# EAGLE board Panel-2 (EAGLE 9.6.2)
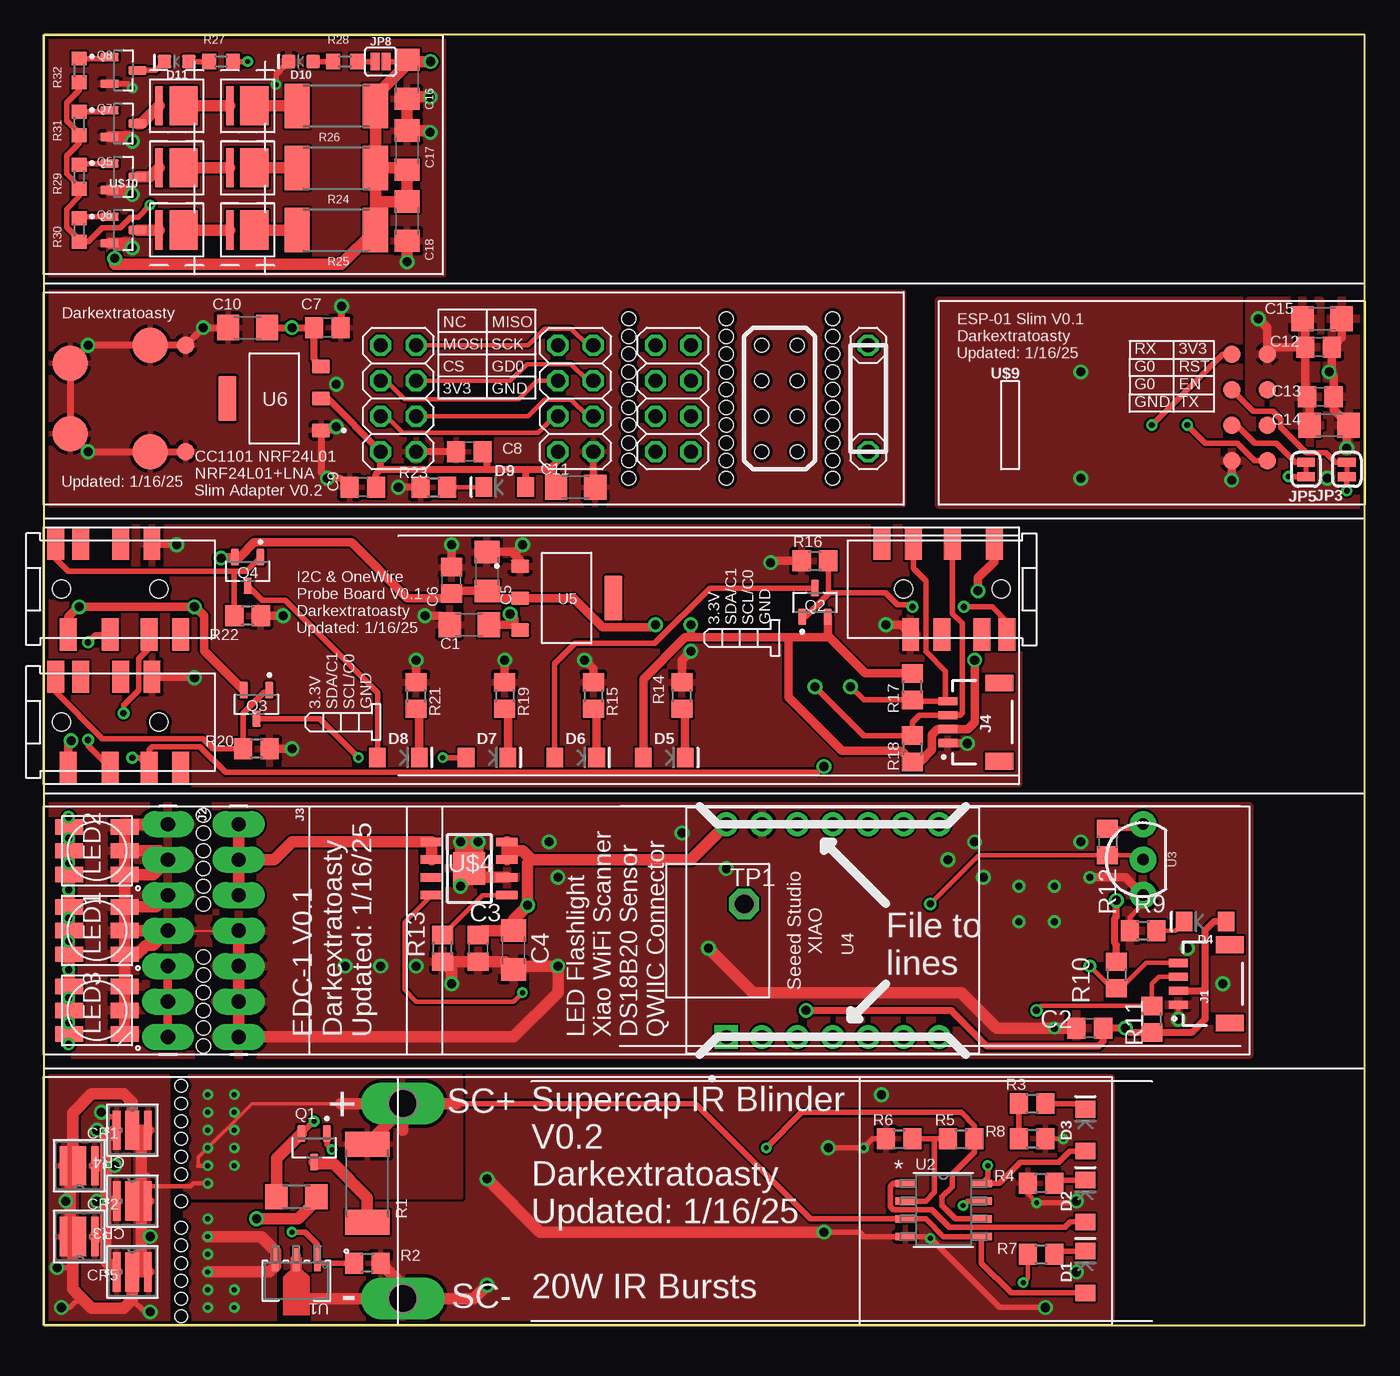
[diagram p0: board, top side]
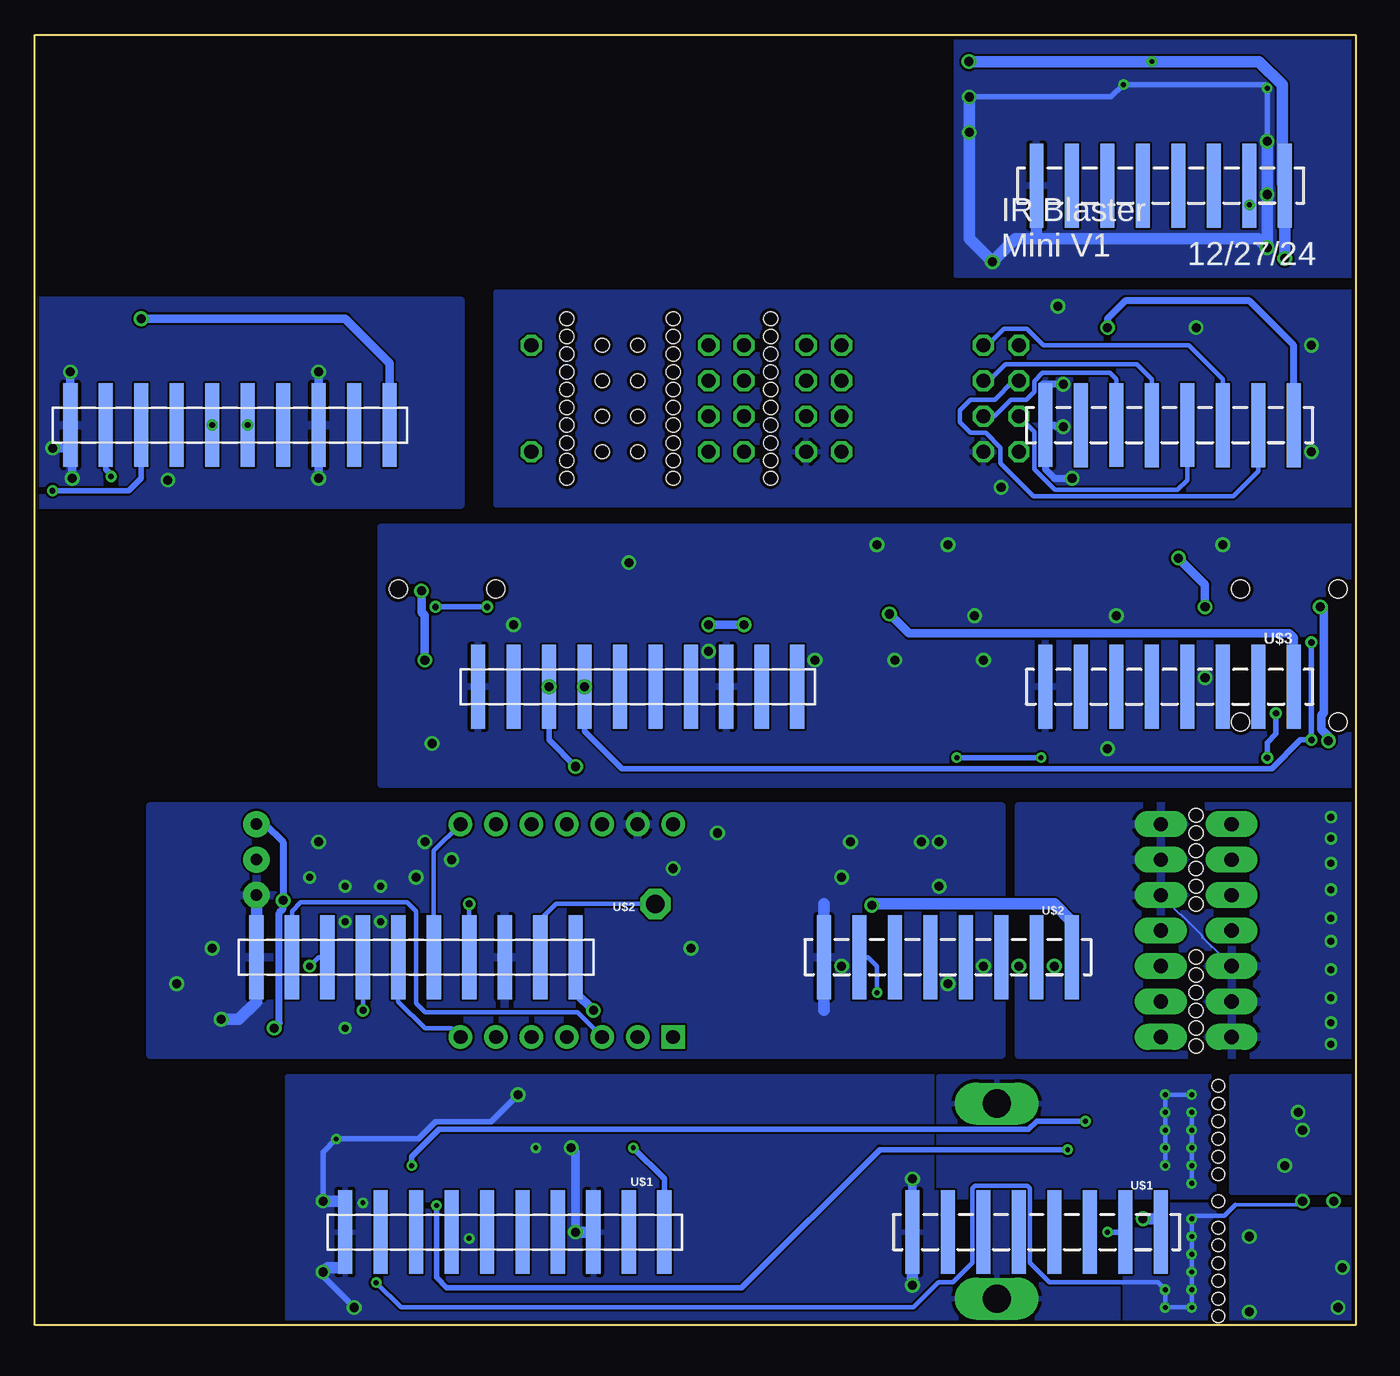
[diagram p1: board, bottom side, seen from below]

Size 94.61 x 92.39 mm. Coordinates in mm from the lower left corner, seen from the top.
Outline: 0,0 94.61,0 94.61,92.39 0,92.39 0,0
Copper layers (1*16): Top 0.035mm / dielectric 1.5mm / Bottom 0.035mm
Design rules "default *": minimum track width 6mil, minimum drill 0.35mm, track to track 6mil, track to pad 6mil, pad to pad 6mil, via to via 6mil, smd to smd 6mil, copper to edge 10mil, drill to drill 6mil, minimum pad ring 10mil, minimum via ring 8mil, stop-mask expansion 4mil, vias tented up to drill 0mil, thermal gap 10mil
Holes 0.9 mm at 9.84,10.79 9.84,8.89 9.84,6.99 9.84,12.06 9.84,13.34 9.84,14.61 9.84,15.88 9.84,17.14 9.84,5.71 9.84,4.45 9.84,3.17 9.84,1.91 9.84,0.64
Holes 1 mm at 11.43,33.97 11.43,32.7 11.43,36.51 11.43,35.24 11.43,21.27 11.43,20 11.43,22.54 11.43,23.81 11.43,25.08 11.43,26.35 11.43,31.43 11.43,30.16 41.91,66.99 41.91,65.72 41.91,64.45 51.44,62.55 53.98,62.55 53.98,65.09 51.44,65.09 51.44,67.63 53.98,67.63 53.98,70.17 51.44,70.17 41.91,68.26 41.91,61.91 41.91,60.64 41.91,63.18 41.91,72.07 41.91,70.8 41.91,69.53 48.9,66.99 48.9,65.72 48.9,64.45 48.9,68.26 48.9,61.91 48.9,60.64 48.9,63.18 48.9,72.07 48.9,70.8 48.9,69.53 56.52,66.99 56.52,65.72 56.52,64.45 56.52,68.26 56.52,61.91 56.52,60.64 56.52,63.18 56.52,72.07 56.52,70.8 56.52,69.53

## Footprints (pad centres in the part's own frame; a part is rotated, then mirrored left to right if it is on the bottom)
C3216 = smd 1.6 x 1.8: 1 -1.4,0; 2 1.4,0
C0805 = smd 1.3 x 1.5: 1 -0.95,0; 2 0.95,0
DIODE_VSMA1094250_VIS = smd 0.55 x 2.8: 1 -1.125,0; 3 1.125,0 | smd 1 x 2.8: 2 0,0
LED-1206 = smd 1.2 x 1.4: A -1.5,0; C 1.5,0
LED-0603 = smd 1 x 1: A -0.877,0; C 0.877,0
R1206 = smd 1.6 x 1.803: 1 -1.422,0; 2 1.422,0
JST04_1MM_RA = smd 0.6 x 1.35: 1 -1.5,0; 2 -0.5,0; 3 0.5,0; 4 1.5,0 | smd 1.2 x 2: NC1 2.8,-3.675; NC2 -2.8,-3.675
1X07_LONGPADS = drill 1.016 pad 1.88 long: 1 0,0; 2 2.54,0; 3 5.08,0; 4 7.62,0; 5 10.16,0; 6 12.7,0; 7 15.24,0
2X04 = drill 1.016 octagon: 1 -3.81,-1.27; 2 -3.81,1.27; 3 -1.27,-1.27; 4 -1.27,1.27; 5 1.27,-1.27; 6 1.27,1.27; 7 3.81,-1.27; 8 3.81,1.27
SMT-JUMPER_2_NC_TRACE_SILK = smd 0.66 x 1.27: 1 -0.521,0; 2 0.521,0
1X01 = drill 1.016 octagon: 1 0,0
SMT-JUMPER_2_NC_PASTE_SILK = smd 0.635 x 1.27: 1 -0.406,0; 2 0.406,0
RGBLED5050 = smd 2 x 1.1: 1 -2,1.7; 2 -2,0; 3 -2,-1.7; 4 2,-1.7; 5 2,0; 6 2,1.7
AO3401 = smd 1.18 x 0.61: 1 -1.025,0.915; 2 -1.025,-0.915; 3 1.025,0
SOT95P240X120-3N = smd 1.32 x 0.6: 1 -1,0.95; 2 -1,-0.95; 3 1,0
R2512 = smd 1.8 x 3.2: 1 -2.8,0; 2 2.8,0
R0805 = smd 1.3 x 1.5: 1 -0.95,0; 2 0.95,0
R0603 = smd 1 x 1.1: 1 -0.85,0; 2 0.85,0
P1-20Y = drill 2.007 pad 2.54 long: TP 0,0
P1-13 = drill 1.321 pad 2.159 octagon: TP 0,0
B1,27 = smd 1.27 x 1.27: TP 0,0
B2,54 = smd 2.54 x 2.54: TP 0,0
SOT89_NXP = smd 0.483 x 1.638: 1 0,-1.505; 2 1.5,-1.505; 3 -1.5,-1.505
SO8_STM = smd 1.46 x 0.533: 1 -2.724,1.905; 2 -2.724,0.635; 3 -2.724,-0.635; 4 -2.724,-1.905; 5 2.724,-1.905; 6 2.724,-0.635; 7 2.724,0.635; 8 2.724,1.905
TO-92-AMMO = drill 0.813 pad 1.88: 1 -2.54,0; 2 0,0; 3 2.54,0
XIAO-GENERIC-THRUHOLE-MODULE14P-2.54-21X17.8MM = drill 1 pad 1.7 square: 1 -7.62,7.62 | drill 1 pad 1.7: 2 -7.62,5.08; 3 -7.62,2.54; 4 -7.62,0; 5 -7.62,-2.54; 6 -7.62,-5.08; 7 -7.62,-7.62; 8 7.62,-7.62; 9 7.62,-5.08; 10 7.62,-2.54; 11 7.62,0; 12 7.62,2.54; 13 7.62,5.08; 14 7.62,7.62
SOT229P700X180-4N = smd 1.31 x 0.93: 1 -3.345,2.29; 2 -3.345,0; 3 -3.345,-2.29 | smd 1.31 x 3.24: 4 3.345,0
BOTH-SMD = smd 1.02 x 6 bottom: 1 7.62,0; 2 10.16,0; 3 12.7,0; 4 15.24,0; 5 17.78,0; 6 20.32,0; 7 22.86,0; 8 25.4,0; 9 27.94,0; 10 30.48,0 | smd 1 x 6 bottom: 19 -27.94,-0.001; 20 -22.86,-0.001; 21 -20.32,0.001; 22 -17.78,-0.001; 23 -15.24,0.001; 24 -12.7,-0.001; 25 -10.16,0.001; 26 -25.4,-0.001
SOIC127P600X175-9N = smd 1.55 x 0.6: 1 -2.7,1.905; 2 -2.7,0.635; 3 -2.7,-0.635; 4 -2.7,-1.905; 5 2.7,-1.905; 6 2.7,-0.635; 7 2.7,0.635; 8 2.7,1.905 | smd 2.3 x 2.3: 9 0,0
PJ-3938PJ = smd 2.3 x 1.2: P$1 -3.25,6.5; P$2 -3.25,3.5; P$3 -3.25,0.7; P$4 -3.25,-1.55; P$5 3.25,0.5; P$6 3.25,2.75; P$7 3.25,5.6; P$8 3.25,7.4 | hole 1.3: 0,0; 0,7
LEFT-H1-SMD = smd 1 x 6 bottom: 1 0,-0.001; 2 2.54,-0.001; 3 5.08,-0.001; 4 7.62,0.001; 5 10.16,-0.001; 6 12.7,0.001; 7 15.24,-0.001; 8 17.78,0.001
RIGHT-H2-SMD = smd 1.02 x 6 bottom: 1 0,0; 2 2.54,0; 3 5.08,0; 4 7.62,0; 5 10.16,0; 6 12.7,0; 7 15.24,0; 8 17.78,0; 9 20.32,0; 10 22.86,0
XSSYSE03-EMC3838A-H90 = smd 2.032 x 2.794: P$1 -0.496,0 | smd 0.508 x 2.794: P$2 1.27,0

## Placement (x,y rotation side)
C1  22uf  [C3216]  30.48,50.16 180 top
C2  1uf  [C0805]  74.93,21.27 180 top
C3  1uf  [C0805]  31.11,26.99 270 top
C4  22uf  [C3216]  33.66,26.86 270 top
C5  22uf  [C3216]  31.75,53.98 90 top
C6  100nf  [C0805]  29.21,53.34 90 top
C7  100nf  [C0805]  20.32,71.44 0 top
C8  100nf  [C0805]  30.48,62.55 180 top
C9  1uf  [C0805]  22.86,60.01 180 top
C10  22uf  [C3216]  14.61,71.44 180 top
C11  22uf  [C3216]  38.1,60.01 0 top
C12  100nf  [C0805]  91.31,70.04 0 top
C13  1uf  [C0805]  91.44,66.48 0 top
C14  22uf  [C3216]  92.08,64.45 0 top
C15  22uf  [C3216]  91.57,72.07 0 top
C16  22uF  [C3216]  26.04,89.22 270 top
C17  22uF  [C3216]  26.04,84.14 90 top
C18  22uF  [C3216]  26.04,79.06 270 top
CR1  VSMA1094250  [DIODE_VSMA1094250_VIS]  6.35,13.97 0 top
CR2  VSMA1094250  [DIODE_VSMA1094250_VIS]  6.35,8.89 0 top
CR3  VSMA1094250  [DIODE_VSMA1094250_VIS]  2.54,6.35 180 top
CR4  VSMA1094250  [DIODE_VSMA1094250_VIS]  2.54,11.43 180 top
CR5  VSMA1094250  [DIODE_VSMA1094250_VIS]  6.35,3.81 0 top
D1  Blue  [LED-1206]  74.61,3.81 90 top
D2  Green  [LED-1206]  74.61,8.89 90 top
D3  Amber  [LED-1206]  74.61,13.97 90 top
D4  Yellow  [LED-1206]  83.19,28.89 180 top
D5  Red  [LED-1206]  44.45,40.64 0 top
D6  Blue  [LED-1206]  38.1,40.64 0 top
D7  Blue  [LED-1206]  31.75,40.64 0 top
D8  Blue  [LED-1206]  25.4,40.64 0 top
D9  Red  [LED-1206]  33.02,60.01 180 top
D10  Orange  [LED-0603]  18.41,90.49 180 top
D11  Blue  [LED-0603]  9.53,90.49 180 top
F1  FUSE  [R1206]  18.1,9.21 180 top
J1  QWIIC_RIGHT_ANGLE  [JST04_1MM_RA]  81.28,24.45 90 top
J2  [1X07_LONGPADS]  8.89,35.88 270 top
J3  [1X07_LONGPADS]  13.97,35.88 270 top
J4  QWIIC_RIGHT_ANGLE  [JST04_1MM_RA]  64.77,43.18 90 top
JP1  [2X04]  38.1,66.36 90 top
JP2  [2X04]  25.4,66.36 90 top
JP3  JUMPER-SMT_2_NC_TRACE_SILK  [SMT-JUMPER_2_NC_TRACE_SILK]  93.34,61.28 90 top
JP4  [2X04]  45.09,66.36 90 top
JP5  JUMPER-SMT_2_NC_TRACE_SILK  [SMT-JUMPER_2_NC_TRACE_SILK]  90.42,61.28 90 top
JP6  [1X01]  59.05,70.17 0 top
JP7  [1X01]  59.05,62.55 0 top
JP8  JUMPER-SMT_2_NC_PASTE_SILK  [SMT-JUMPER_2_NC_PASTE_SILK]  24.13,90.49 0 top
LED1  RGBLED5050  [RGBLED5050]  3.81,28.26 0 top
LED2  RGBLED5050  [RGBLED5050]  3.81,33.97 0 top
LED3  RGBLED5050  [RGBLED5050]  3.81,22.54 0 top
Q1  AO3401  [AO3401]  19.37,12.7 270 top
Q2  AO3401  [AO3401]  55.24,51.75 90 top
Q3  AO3401  [AO3401]  15.24,44.45 270 top
Q4  AO3401  [AO3401]  14.61,53.98 270 top
Q5  MMBT2222A  [SOT95P240X120-3N]  5.71,82.23 0 top
Q6  MMBT2222A  [SOT95P240X120-3N]  5.71,78.42 0 top
Q7  MMBT2222A  [SOT95P240X120-3N]  5.71,86.04 0 top
Q8  MMBT2222A  [SOT95P240X120-3N]  5.71,89.85 0 top
R1  5R  [R2512]  23.18,10.16 90 top
R2  2K7  [R0805]  23.18,4.45 180 top
R3  2K7  [R0805]  70.8,15.88 0 top
R4  2K7  [R0805]  71.44,10.16 180 top
R5  2K7  [R0805]  65.72,13.34 0 top
R6  27K  [R0805]  61.28,13.34 0 top
R7  2K7  [R0805]  71.44,5.08 0 top
R8  1K  [R0805]  70.8,13.34 180 top
R9  2K2  [R0805]  78.74,28.26 0 top
R10  10K  [R0805]  76.83,25.08 270 top
R11  10K  [R0805]  79.38,21.91 90 top
R12  10K  [R0805]  76.2,34.61 270 top
R13  10K  [R0805]  28.57,26.99 90 top
R14  2k2  [R0805]  45.72,45.09 90 top
R15  2k2  [R0805]  39.37,45.09 270 top
R16  10k  [R0805]  55.24,54.74 0 top
R17  10k  [R0805]  62.23,45.72 90 top
R18  10k  [R0805]  62.23,41.27 270 top
R19  2k2  [R0805]  33.02,45.09 270 top
R20  10k  [R0805]  15.24,41.27 180 top
R21  2k2  [R0805]  26.67,45.09 270 top
R22  10k  [R0805]  14.61,50.8 180 top
R23  2K2  [R0805]  27.94,60.01 0 top
R24  5R1  [R2512]  20.95,82.87 0 top
R25  5R1  [R2512]  20.95,78.42 0 top
R26  5R1  [R2512]  20.95,87.31 0 top
R27  2K2  [R0603]  12.7,90.49 0 top
R28  2K2  [R0603]  21.59,90.49 0 top
R29  1K  [R0603]  2.54,82.23 90 top
R30  1K  [R0603]  2.54,78.42 90 top
R31  1K  [R0603]  2.54,86.04 90 top
R32  1K  [R0603]  2.54,89.85 90 top
SC+  PTR1PAD1-20Y  [P1-20Y]  25.72,15.88 90 top
SC-  PTR1PAD1-20Y  [P1-20Y]  25.72,1.91 90 top
TP1  PTR1PAD1-13  [P1-13]  50.16,30.16 0 top
TP2  PTR1B1,27  [B1,27]  10.16,70.17 90 top
TP3  PTR1B1,27  [B1,27]  10.16,62.55 90 top
TP4  PTR1B2,54  [B2,54]  7.62,70.17 0 top
TP5  PTR1B2,54  [B2,54]  7.62,62.55 0 top
TP6  PTR1B2,54  [B2,54]  1.91,63.82 0 top
TP7  PTR1B2,54  [B2,54]  1.91,68.9 0 top
TP8  PTR1B1,27  [B1,27]  87.63,61.91 0 top
TP9  PTR1B1,27  [B1,27]  87.63,64.45 0 top
TP10  PTR1B1,27  [B1,27]  87.63,66.99 0 top
TP11  PTR1B1,27  [B1,27]  87.63,69.53 0 top
TP12  PTR1B1,27  [B1,27]  85.09,61.91 0 top
TP13  PTR1B1,27  [B1,27]  85.09,64.45 0 top
TP14  PTR1B1,27  [B1,27]  85.09,66.99 0 top
TP15  PTR1B1,27  [B1,27]  85.09,69.53 0 top
U1  BSS87  [SOT89_NXP]  18.1,3.17 180 top
U2  LM393DT  [SO8_STM]  64.45,8.26 0 top
U3  DS18B20  [TO-92-AMMO]  78.74,33.34 90 top
U4  XIAO-THRUHOLE  [XIAO-GENERIC-THRUHOLE-MODULE14P-2.54-21X17.8MM]  56.52,28.26 90 top
U5  AMS1117-3.3  [SOT229P700X180-4N]  37.47,52.07 0 top
U6  AMS1117-3.3  [SOT229P700X180-4N]  16.51,66.36 180 top
U$1  BOTH-SMD  [BOTH-SMD]  41.91,6.67 0 top
U$2  BOTH-SMD  [BOTH-SMD]  48.26,26.35 0 top
U$3  BOTH-SMD  [BOTH-SMD]  32.38,45.72 0 top
U$4  CN5711  [SOIC127P600X175-9N]  30.48,32.7 180 top
U$5  PJ-3938PJ  [PJ-3938PJ]  61.59,52.7 270 top
U$6  PJ-3938PJ  [PJ-3938PJ]  8.26,43.18 90 top
U$7  PJ-3938PJ  [PJ-3938PJ]  8.26,52.7 90 top
U$8  LEFT-H1-SMD  [LEFT-H1-SMD]  4.45,64.45 0 top
U$9  RIGHT-H2-SMD  [RIGHT-H2-SMD]  69.22,64.45 0 top
U$10  LEFT-H1-SMD  [LEFT-H1-SMD]  5.08,81.6 0 top
U$11  XSSYSE03-EMC3838A-H90  [XSSYSE03-EMC3838A-H90]  9.53,82.87 180 top
U$12  XSSYSE03-EMC3838A-H90  [XSSYSE03-EMC3838A-H90]  14.61,82.87 180 top
U$13  XSSYSE03-EMC3838A-H90  [XSSYSE03-EMC3838A-H90]  14.61,78.42 180 top
U$14  XSSYSE03-EMC3838A-H90  [XSSYSE03-EMC3838A-H90]  9.53,78.42 180 top
U$15  XSSYSE03-EMC3838A-H90  [XSSYSE03-EMC3838A-H90]  9.53,87.31 180 top
U$16  XSSYSE03-EMC3838A-H90  [XSSYSE03-EMC3838A-H90]  14.61,87.31 180 top

## Library data of the parts
C1-C18 = rcl; SPICEPREFIX: C
CR1-CR5 = VSMA1094250; COPYRIGHT: Copyright (C) 2025 Ultra Librarian. All rights reserved.; MANUFACTURER_PART_NUMBER: VSMA1094250; MFR_NAME: Vishay
D1 D6-D8 = SparkFun-LED; PROD_ID: DIO-09911
D2 = SparkFun-LED; PROD_ID: DIO-00862
D3 D5 D9 = SparkFun-LED; PROD_ID: DIO-09912
D4 = SparkFun-LED; PROD_ID: DIO-09909
D10 = SparkFun-LED; PROD_ID: DIO-00821
D11 = SparkFun-LED; PROD_ID: DIO-08575
F1 R1-R32 = rcl; SPICEPREFIX: R
J1 J4 = SparkFun-Connectors; PROD_ID: CONN-13694
J2 J3 = SparkFun-Connectors
JP1 JP2 JP4 JP6 JP7 = pinhead
JP3 JP5 JP8 = SparkFun-Jumpers
LED1-LED3 = adafruit
Q1-Q4 = DMG2305UX-7; MANUFACTURER: Diodes Inc.; MAXIMUM_PACKAGE_HEIGHT: 1.1mm; PARTREV: 09/2018; STANDARD: IPC-7351B
Q5-Q8 = MMBT2222A; MANUFACTURER: Diotec; MAXIMUM_PACKAGE_HEIGHT: 1.20mm; PARTREV: 2024-03-11; SNAPEDA_PACKAGE_ID: 124619; STANDARD: IPC 7351B
SC+ SC- TP1-TP15 = testpad
U1 = AP4438; COPYRIGHT: Copyright (C) 2025 Ultra Librarian. All rights reserved.; DIGIKEY_PART_NUMBER_1: 568-6228-2-ND; DIGIKEY_PART_NUMBER_2: 568-6228-1-ND; DIGIKEY_PART_NUMBER_3: 568-6228-6-ND; DIGIKEY_PART_NUMBER_4: BSS87INTR-ND; MANUFACTURER_PART_NUMBER: BSS87; MFR_NAME: NXP
U2 = LM393DTR; COPYRIGHT: Copyright (C) 2025 Ultra Librarian. All rights reserved.; MANUFACTURER_PART_NUMBER: LM393DT; MFR_NAME: STMicroelectronics
U3 = DS18B20; AVAILABILITY: In Stock; CHECK_PRICES: https://www.snapeda.com/parts/DS18B20/UMW/view-part/?ref=eda; DESCRIPTION: Temperature Sensor Digital, Local -55°C ~ 125°C 9 b, 10 b, 11 b, 12 b TO-92; MF: UMW; MP: DS18B20; PACKAGE: None; PRICE: None; SNAPEDA_LINK: https://www.snapeda.com/parts/DS18B20/UMW/view-part/?ref=snap
U4 = Seeed Studio XIAO Series
U5 U6 = AMS1117-3.3; AVAILABILITY: Not in stock; CHECK_PRICES: https://www.snapeda.com/parts/AMS1117-3.3/Advanced+Monolithic+Systems/view-part/?ref=eda; DESCRIPTION: Sot223/Pkg 1-Amp 3.3-Volt Low Drop Out Voltage Regulatator; MF: Advanced Monolithic Systems; MP: AMS1117-3.3; PACKAGE: SOT-223 Seeed Technology; PRICE: None; SNAPEDA_LINK: https://www.snapeda.com/parts/AMS1117-3.3/Advanced+Monolithic+Systems/view-part/?ref=snap
U$1-U$3 U$8-U$10 = Flipper-Zero-GPIO-Headers
U$4 = CN5711
U$5-U$7 = PJ-3938PJ
U$11-U$16 = XSSY SE03-EMC3838A-H90

## Nets
5VIN: F1.1 U$1.19
+3V1: C2.1 D4.A J1.2 R10.1 R11.1 R12.1 U3.3 U$2.1
+3V2: C5.1 C6.1 D5.A J4.2 Q2.2 Q3.2 Q4.2 R17.2 R18.2 U5.2 U$5.P$1 U$6.P$1 U$7.P$1
+3V3: R5.2 U2.6 U$1.1
+3V4: C8.1 C9.1 C11.1 D9.A JP1.2 JP2.2 U6.2
+3V5: C12.1 C13.1 C14.1 C15.1 TP11.TP U$9.1
+5V: C3.1 C4.1 U4.14 U$2.19 U$4.3 U$4.4
+5V1: C1.1 U5.3 U$3.19
+5V2: C7.1 C10.1 U6.3 U$8.1
+5V3: C16.1 C17.1 C18.1 JP8.2 R24.2 R25.2 R26.2 R27.2 U$10.1
CHA: JP3.2 TP14.TP
CHB: JP5.2 TP13.TP
CS: JP1.4 JP2.4 U$8.4
FLIP_RX: U4.7 U$2.6
FLIP_TX: U4.8 U$2.5
FRX: TP8.TP U$9.6
FTX: TP15.TP U$9.5
GD0: JP1.3 JP2.3 U$8.6
GND: R2.1 R4.2 R6.1 R8.1 SC-.TP U1.1 U2.4 U$1.3 U$1.10 U$1.25
GND1: C2.2 C3.2 C4.2 J1.1 J2.1 J2.2 J2.3 J2.4 J3.4 J3.5 J3.6 J3.7 LED1.4 LED1.5 LED1.6 LED2.4 LED2.5 LED2.6 LED3.4 LED3.5 LED3.6 R9.1 R13.1 U3.1 U4.13 U$2.3 U$2.10 U$2.25 U$4.2 U$4.9
GND2: C1.2 C5.2 C6.2 J4.1 R14.2 R15.1 R16.1 R19.1 R20.1 R21.1 R22.1 U5.1 U$3.3 U$3.10 U$3.25 U$5.P$5 U$6.P$5 U$7.P$5
GND3: C7.2 C8.2 C9.2 C10.2 C11.2 JP1.1 JP2.1 R23.1 TP2.TP TP3.TP TP4.TP TP5.TP TP6.TP TP7.TP U6.1 U$8.8
GND4: C12.2 C13.2 C14.2 C15.2 TP12.TP U$9.3 U$9.10
GND5: C16.2 C17.2 C18.2 D10.C Q5.2 Q6.2 Q7.2 Q8.2 U$10.8
INPUT: R2.2 U1.3 U$1.26
LED+: J2.5 J2.6 J2.7 J3.1 J3.2 J3.3 LED1.1 LED1.2 LED1.3 LED2.1 LED2.2 LED2.3 LED3.1 LED3.2 LED3.3 U$4.5 U$4.6
LED_TRIG: U$2.24 U$4.8
MISO: JP1.7 JP2.7 U$8.3
MOSI: JP1.6 JP2.6 U$8.2
N$1: Q1.3 R1.1
N$2: CR1.2 CR1.3 CR2.2 CR2.3 CR3.2 CR3.3 CR4.2 CR4.3 CR5.2 CR5.3 D1.A R1.2 SC+.TP U2.3 U2.5
N$3: D2.A U2.1
N$4: R5.1 R6.2 U2.2
N$5: Q1.1 U2.7
N$6: D2.C R4.1
N$7: D1.C R7.2
N$8: D3.C R3.2
N$9: R3.1 R8.2
N$10: R13.2 U$4.1
N$11: D3.A F1.2 Q1.2 U2.8
N$12: D4.C R9.2
N$13: CR1.1 CR2.1 CR3.1 CR4.1 CR5.1 R7.1 U1.2
N$14: TP1.TP U$2.2
N$15: D6.C R15.2
N$16: Q2.1 R16.2 U$5.P$8
N$17: D7.C R19.2
N$18: Q3.1 R20.2 U$6.P$8
N$19: D8.C R21.2
N$20: Q4.1 R22.2 U$7.P$8
N$21: D5.C R14.1
N$22: D6.A Q2.3
N$23: D7.A Q3.3
N$24: D8.A Q4.3
N$25: D9.C R23.2
N$26: JP3.1 U$9.8
N$27: JP5.1 U$9.9
N$28: D10.A R28.1
N$29: Q5.1 R29.2
N$30: Q5.3 U$11.P$2
N$31: U$11.P$1 U$12.P$2
N$32: R24.1 U$12.P$1
N$33: R25.1 U$13.P$1
N$34: U$13.P$2 U$14.P$1
N$35: Q6.3 U$14.P$2
N$36: Q6.1 R30.2
N$37: Q7.1 R31.2
N$38: Q7.3 U$15.P$2
N$39: U$15.P$1 U$16.P$2
N$40: R26.1 U$16.P$1
N$41: D11.A R27.1
N$42: D11.C Q8.3
N$43: Q8.1 R32.2
N$44: R29.1 R30.1 R31.1 R32.1 U$10.2
N$45: JP8.1 R28.2
SCK: JP1.5 JP2.5 U$8.5
SCL: J1.4 R10.2 U$2.8
SCL1: J4.4 R17.1 U$3.8 U$5.P$3 U$6.P$3 U$7.P$3
SDA: J1.3 R11.2 U$2.7
SDA1: J4.3 R18.1 U$3.7 U$5.P$2 U$6.P$2 U$7.P$2
THERM: R12.2 U3.2 U$2.4
WIFI_CHECK: U4.3 U$2.9

## Tracks (layer width: path | path; a pad name or v marks a point on that pad's centre or on a via)
5VIN  (via drill 0.65)
  Top 0.813: v15.24,7.62 18.21,7.62 19.52,8.93 F1.1
  Bottom 0.813: U$1.19 13.97,7.62 v15.24,7.62
+3V1  (via drill 0.65)
  Top 0.305: R12.1 78.42,35.56 U3.3
  Top 0.508: v54.61,22.54 54.62,22.53 65.03,22.53 67.57,19.99 75.56,19.99 75.88,20.31 C2.1 v77.47,21.27 77.78,20.96 R11.1 82.23,20.96 83.19,21.91 83.19,23.81 | D4.A 83.82,28.89 83.19,28.26 83.19,24.08 | 83.19,24.08 83.19,23.81 | J1.2 83.05,23.95 | 83.05,23.95 83.19,23.81 | 83.05,23.95 83.19,24.08 | R10.1 76.83,27.24 76.73,27.34 76.73,29.18 76.83,29.28 v76.83,30.42
  Bottom 0.508: v77.47,21.27 77.12,21.63 77.12,29.52 76.83,29.8 v76.83,30.42 76.83,34.61 78.11,35.88 U3.3
  Bottom 0.61: U$2.1 55.88,23.81 v54.61,22.54
+3V2  (via drill 0.65)
  Top 0.61: R17.2 58.86,46.67 56.29,49.24 | D5.A 42.95,46.25 45.95,49.24 46.35,49.24 | 56.29,49.24 53.34,49.24 | 53.34,49.24 46.35,49.24 | 53.34,49.24 53.34,44.96 57.18,41.12 61.44,41.12 R18.2 62.76,40.33 63.64,41.2 63.64,42.3 64.02,42.68 J4.2 66.2,42.68 66.68,43.17 v66.68,47.62 | U$5.P$1 68.09,54.69 66.93,53.52 v66.93,52.58 | v43.81,50.16 43.64,49.99 40.02,49.99 37.95,52.07 U5.2 32.26,52.07 C5.1 29.39,52.58 C6.1 28.89,52.07 26.04,52.07 22.06,56.05 15.07,56.05 14.02,55 Q4.2 12.77,55 v12.7,54.93 | v46.35,50.16 46.35,49.24 | U$7.P$1 1.75,50.73 2.46,51.44 v2.54,51.44 v10.79,51.44 10.86,51.44 11.5,50.79 11.5,48.3 Q3.2 | U$6.P$1 1.75,41.66 v1.96,41.86 | Q2.2 56.16,49.37 56.29,49.24
  Bottom 0.61: v66.93,52.58 v66.92,52.57 66.92,51.07 66.68,50.83 v66.68,47.62 | v43.81,50.16 v46.35,50.16 | v1.96,41.86 1.96,42.17 2.46,42.68 2.46,43.68 2.29,43.85 2.29,51.19 v2.54,51.44 | v10.79,51.44 10.79,53.02 v12.7,54.93
+3V3  (via drill 0.35)
  Top 0.406: v51.75,12.7 54.29,15.24 65.72,15.24 66.67,14.29 R5.2 66.67,12.38 65.09,10.79 65.09,9.93 64.35,9.19 64.35,8.59 65.32,7.62 U2.6
  Bottom 0.406: U$1.1 49.53,10.48 v51.75,12.7
+3V4
  Top 0.508: C9.1 23.81,60.96 24.13,61.28 | 24.13,61.28 JP2.2 20.32,66.36 U6.2 | 24.13,61.28 31.75,61.28 | 31.75,61.28 34.52,61.28 | 34.52,61.28 D9.A | 34.52,61.28 36.2,61.28 | 36.2,61.28 36.83,61.91 JP1.2 | 36.2,61.28 36.7,60.77 C11.1 | 31.75,61.28 31.75,62.23 C8.1
+3V5  (via drill 0.65)
  Top 0.61: C14.1 90.67,66.3 C13.1 90.36,66.61 C12.1 | C15.1 90.36,71.88 C12.1 | v87,72.07 87.63,71.44 TP11.TP 88.14,70.04 C12.1
  Bottom 0.61: U$9.1 69.22,68.9 72.39,72.07 v87,72.07
  pour Top: 91.44,73.34 91.44,63.18 86.36,63.18 86.36,73.34
+5V  (via drill 0.65)
  Top 0.813: U$4.4 33.18,33.97 | 33.18,33.97 U$4.3 | C3.1 31.44,28.26 C4.1 33.66,29.02 34.67,30.04 v34.67,30.07 34.67,33.08 34.92,33.34 | 34.92,33.34 34.29,33.97 33.18,33.97 | U4.14 46.35,33.34 34.92,33.34
  Bottom 0.305: U$2.19 20.32,28.89
  Bottom 0.813: 20.32,28.89 21.59,30.16 34.58,30.16 v34.67,30.07
+5V1  (via drill 0.65)
  Top 0.61: C1.1 33.73,50.16 | 33.73,50.16 U5.3 | v33.4,50.93 33.73,50.59 33.73,50.16
  Bottom 0.61: U$3.19 4.45,49.23 4.74,49.53 32,49.53 v33.4,50.93
+5V2  (via drill 0.65)
  Top 0.508: C10.1 v17.78,71.44 C7.1 19.37,69.13 U6.3
  Bottom 0.508: U$8.1 4.45,70.17 7.62,73.34 16.51,73.34 17.78,72.07 v17.78,71.44
+5V3  (via drill 0.35, 0.65)
  Top 0.406: JP8.2 25.91,90.49 C16.1 | R27.2 v14.61,90.49
  Top 0.813: R24.2 25.91,82.87 C17.1 C18.1 23.89,80.46 23.75,80.33 R25.2 | C16.1 26.04,90.31 23.75,88.03 R26.2 R24.2 | R24.2 R25.2 | R25.2 21.32,75.98 5.08,75.98 v5.08,76.39 | v27.72,90.49 25.91,90.49
  Bottom 0.813: v5.08,76.39 U$10.1 5.26,81.78 5.26,88.82 6.93,90.49 v14.61,90.49 v27.72,90.49
CHA
  Top 0.406: TP14.TP 86.64,65.44 88.04,65.44 88.62,64.86 88.62,64.3 90.44,62.48 91.84,62.48 92.53,61.8 JP3.2
CHB
  Top 0.406: TP13.TP 85.47,64.45 86.77,63.16 88.29,63.16 89.65,61.8 JP5.2
CS
  Top 0.305: JP1.4 36.6,65.09 35.41,63.89 25.72,63.89 24.53,65.09 JP2.4
  Bottom 0.305: U$8.4 12.06,60.52 12.78,59.81 21.55,59.81 23.03,61.29 23.03,63.99 JP2.4
FLIP_RX
  Bottom 0.305: U4.7 64.77,21.27 66.67,21.27 68.58,23.18 U$2.6
FLIP_TX
  Bottom 0.305: U4.8 66.04,33.97 U$2.5
FRX  (via drill 0.4)
  Top 0.406: TP8.TP 86.75,61.91 85.5,63.16 83.21,63.16 U$9.6
  other vias: 81.92,64.45
FTX  (via drill 0.4)
  Top 0.406: TP15.TP 84.45,69.53 U$9.5
  other vias: 79.38,64.45
GD0
  Top 0.305: JP2.3 34.69,65.09 35.88,66.28 37.78,66.28 38.97,65.09 JP1.3
  Bottom 0.305: JP2.3 25.89,65.09 24.7,66.28 23.59,66.28 23.04,66.83 23.04,67.61 22.44,68.21 17.6,68.21 17.14,67.75 U$8.6
GND  (via drill 0.35, 0.65)
  Top 0.305: U2.4 61.91,6.35 63.37,6.35 | R4.2 70.49,9.4 v71.12,8.76 | R8.1 v73.03,13.34
  Top 0.406: R6.1 59.37,13.34 v58.74,12.7 v56.2,12.7 | v55.88,6.67 58.42,6.67 58.74,6.35 61.91,6.35 | v71.75,1.27 68.45,1.27 v63.5,6.22 63.37,6.35 U2.4 | v71.12,8.76 73.85,8.76 v73.98,8.89
  Top 0.813: U1.1 18.1,1.91 SC-.TP | R2.1 25.72,2.85 SC-.TP | SC-.TP 30.8,1.91 v31.75,2.86 | v31.75,10.48 35.56,6.67 v55.88,6.67
  Bottom 0.406: v71.75,1.27 73.98,3.49 v73.98,3.81 | v73.98,8.89 73.98,12.38 v73.03,13.34 67.15,13.34 65.91,14.57 61.94,14.57 v60.01,16.51
  Bottom 0.61: v56.2,12.7 55.88,12.38 v55.88,6.67 | U$1.25 v31.75,10.48
  Bottom 0.813: v73.98,8.89 72.39,8.89 U$1.10 72.39,4.13 73.66,4.13 v73.98,3.81 | U$1.3 v55.88,6.67 | U$1.25 v31.75,2.86
  pour Top (rank 3): 10.16,17.78 76.52,17.78 76.52,0 10.16,0
  pour Bottom (rank 3): 10.16,17.78 76.52,17.78 76.52,0 10.16,0
GND1  (via drill 0.5, 0.65)
  Top 0.152: J2.4 J3.4
  Top 0.305: R9.1 77.79,29.21 78.74,30.16 U3.1 | J1.1 v81.28,21.91
  Top 0.61: U3.1 77.47,32.07 v74.93,32.07
  Top 0.813: U$4.2 31.11,32.07 U$4.9 | v29.21,24.45 29.21,25.4 R13.1 C3.2 33.08,26.04 C4.2 33.91,25.72 v36.83,25.72 36.83,23.81 33.66,20.64 J3.7 J3.6 J3.5 J3.4 | U$4.9 30.48,32.07 v29.84,31.43 29.84,32.07 | U$4.9 29.84,33.34 v29.84,34.61 | U$4.9 31.11,33.34 v31.11,34.61 v29.84,34.61 | v29.84,34.61 30.48,33.97 | v47.62,26.99 50.8,23.81 65.72,23.81 68.27,21.27 C2.2 | LED3.4 LED3.5 LED3.6 LED1.4 | LED1.4 LED1.5 | LED1.5 LED1.6 | LED1.6 LED2.4 | LED2.4 LED2.5 | LED2.5 LED2.6 6.01,35.88 J2.1 | LED2.5 8.26,33.97 J2.2 7.83,32.27 LED2.4 | LED1.6 8.05,29.96 J2.3 | LED1.5 J2.4 7.85,27.22 7.33,27.22 6.67,26.56 LED1.4
  Bottom 0.813: 38.1,22.54 U$2.25 38.1,30.16 | U3.1 U$2.10 78.74,23.18 80.01,21.91 v81.28,21.91
  other vias: 24.13,25.72 21.59,25.72 26.67,25.72 36.2,34.61 45.72,35.24 36.83,32.07 48.9,32.7 64.77,33.34 74.3,34.61 67.31,32.07 81.92,26.99 84.45,24.45 66.67,34.61 69.85,28.89 72.39,28.89 72.39,31.43 69.85,31.43 72.39,21.27
  pour Top: 0,37.15 86.36,37.15 86.36,19.37 0,19.37
  pour Bottom: 25.4,37.15 86.36,37.15 86.36,19.37 25.4,19.37
GND2  (via drill 0.65)
  Top 0.61: R14.2 45.72,47.62 v46.35,48.26 | R15.1 39.37,46.99 v38.73,47.62 | R19.1 v33.02,47.62 | R21.1 v26.67,47.62 | R20.1 v17.78,41.27 | R22.1 v17.14,50.8 | U$7.P$5 9.45,55.95 v9.53,55.88 | U$6.P$5 10.72,46.43 v10.79,46.35 | R16.1 52.2,54.74 v52.07,54.61 | U$5.P$5 61.38,50.16 v60.33,50.16 | J4.1 66.14,41.68 v66.17,41.66 | C1.2 28.45,50.8 v27.3,50.8 | C6.2 v29.21,55.88 | C5.2 33.52,55.38 | U5.1 34.12,54.78 33.52,55.38 | 33.52,55.38 33.78,55.38 v34.29,55.88
  pour Top: 0,57.15 69.85,57.15 69.85,38.73 0,38.73
  pour Bottom: 0,57.15 69.85,57.15 69.85,38.73 0,38.73
GND3  (via drill 0.65)
  Top 0.508: C8.2 JP2.1 | R23.1 v25.4,60.01 | C11.2 39.37,60.14 JP1.1 | C9.2 21.27,60.64 v20.32,60.64 19.86,61.11 U6.1 20.7,64.07 v20.95,64.33 | C10.2 v11.43,71.44 TP2.TP TP4.TP v3.17,70.17 TP7.TP TP6.TP v3.17,62.55 TP5.TP TP3.TP | C7.2 21.34,71.5 v21.34,72.96
  Bottom 0.508: U$8.8 22.48,64.71 22.48,67.37 v20.95,67.37 | U$8.8 21.59,64.45 21.46,64.33 v20.95,64.33 | U$8.8 22.23,61.28 21.59,60.64 v20.32,60.64
  pour Top: 0,73.98 61.59,73.98 61.59,58.74 0,58.74
  pour Bottom: 0,73.98 61.59,73.98 61.59,58.74 0,58.74
GND4  (via drill 0.65)
  Top 0.61: C15.2 92.97,70.75 C12.2 92.26,68.45 v92.08,68.26 92.39,67.95 C13.2 92.39,65.54 C14.2 93.34,64.32 v93.34,62.81 | TP12.TP v85.09,60.52
  Bottom 0.61: v74.3,68.26 U$9.3 v74.3,60.64 | v92.08,68.26 U$9.10 92.08,63.18 | v91.95,60.64 91.95,63.31 92.08,63.18 | v93.34,62.81 92.45,62.81 92.08,63.18
  pour Top (rank 2): 64.14,58.74 64.14,73.34 94.61,73.34 94.61,58.74
  pour Bottom (rank 2): 64.14,73.34 94.61,73.34 94.61,58.74 64.14,58.74
GND5  (via drill 0.35, 0.65)
  Top 0.406: D10.C 16.64,89.59 v16.64,88.84 | Q8.2 6.03,88.9 v6.35,88.58
  Top 0.813: Q7.2 6.03,85.09 v6.35,84.77 | Q5.2 6.03,81.28 v6.35,80.96 | Q6.2 6.03,77.47 v6.35,77.15 | C18.2 v26.04,76.14 | v27.69,87.95 26.16,87.95 C16.2 C17.2 27.56,85.54 v27.69,85.41
  Bottom 0.406: v6.35,84.77 v6.35,88.58 6.35,88.71 6.48,88.84 v16.64,88.84 17.53,87.95 v27.69,87.95
  Bottom 0.813: v6.35,84.77 v6.35,80.96 v6.35,77.15 6.99,77.79 22.86,77.79 | v27.69,87.95 v27.69,85.41 27.69,77.79 v26.04,76.14 24.38,77.79 22.86,77.79 | 22.86,77.79 U$10.8
  pour Bottom (isolate 0.152): 0,92.39 28.57,92.39 28.57,75.25 0,75.25
  pour Top (isolate 0.152): 0,92.39 28.57,92.39 28.57,75.25 0,75.25
INPUT  (via drill 0.35)
  Top 0.406: v17.78,6.67 18.73,6.67 19.6,5.8 U1.3 19.83,4.45 R2.2
  Bottom 0.406: U$1.26 v17.78,6.67
LED+  (via drill 0.5)
  Top 0.61: J2.5 J2.6 J2.7
  Top 0.813: v1.78,36.39 1.78,35.7 LED2.1 LED2.2 LED2.3 LED1.1 LED1.2 LED1.3 LED3.1 LED3.2 LED3.3 1.81,20.16 v1.78,20.13 | U$4.6 U$4.5 17.78,34.61 16.51,33.34 J3.2 | J3.2 J3.1 | J3.2 J3.3
  Bottom 0.152: J3.3 12.6,29.43 12.55,29.43 11,27.88 11,27.77 10.31,27.09 10.26,27.09 J2.5
  other vias: 1.78,34.86 1.78,33.08 1.78,31.18 1.78,29.15 1.78,27.5 1.78,25.46 1.78,23.43 1.78,21.65
  pour Bottom: 0,37.15 24.13,37.15 24.13,19.37 0,19.37
LED_TRIG  (via drill 0.35)
  Top 0.305: v34.29,23.81 33.66,23.18 26.67,23.18 25.84,24.01 25.84,28.86 U$4.8
  Bottom 0.305: U$2.24 34.92,26.35 34.29,25.72 v34.29,23.81
MISO
  Top 0.305: JP2.7 34.69,70.17 35.88,71.36 37.78,71.36 38.97,70.17 JP1.7
  Bottom 0.305: U$8.3 9.53,67.75 11.94,70.17 22.37,70.17 23.56,71.36 25.21,71.36 26.4,70.17 JP2.7
MOSI
  Top 0.305: JP1.6 35.33,67.63 34.01,66.31 25.85,66.31 24.53,67.63 JP2.6
  Bottom 0.305: U$8.2 6.99,61.16 8.79,59.35 23.08,59.35 25.45,61.73 25.45,62.84 26.51,63.89 27.62,63.89 28.37,64.65 28.37,65.53 27.62,66.28 25.86,66.28 24.51,67.63 JP2.6
N$1
  Top 0.813: Q1.3 19.49,11.55 20.77,11.55 23.18,9.13 R1.1
N$2  (via drill 0.35, 0.65)
  Top 0.254: 6.99,10.79 7.46,10.79 | 11.06,11.43 11.06,12.01 14.92,15.88 SC+.TP
  Top 0.305: 11.06,11.43 v11.75,11.43 | v11.75,10.16 10.74,10.16 10.52,9.94 7.4,9.94 6.99,9.53
  Top 0.406: v7.62,6.35 6.99,6.35 | v7.62,0.95 7.23,0.95 6.35,1.83 | v1.27,1.27 1.91,1.27 2.65,2.02 | v0.95,4.13 2.06,4.13 | v1.59,8.89 1.91,8.89 | D1.A 69.31,2.31 67.18,4.45 U2.5 64.45,6.35 63.18,7.62 U2.3 54.93,7.62 46.67,15.88 29.53,15.88
  Top 0.813: R1.2 25.72,15.5 SC+.TP | CR5.2 CR5.3 | CR2.2 6.99,8.89 | CR2.3 6.99,8.89 | 6.99,13.97 CR1.2 6.35,15.95 5.73,16.56 3.45,16.56 2.06,15.18 2.06,11.9 CR4.2 1.91,11.43 | 6.99,13.97 CR1.3 | CR5.2 6.99,4.45 6.99,6.35 6.99,8.89 | 6.99,8.89 6.99,9.53 6.99,10.79 6.99,13.97 | 1.91,11.43 CR4.3 | 1.91,6.35 CR3.2 2.06,5.88 2.06,4.13 2.06,2.6 2.65,2.02 3.45,1.22 5.73,1.22 6.35,1.83 CR5.2 | 1.91,6.35 CR3.3 | 1.91,6.35 1.91,8.89 1.91,11.43 | SC+.TP 21.27,15.88 | SC+.TP 25.72,13.97 | SC+.TP 29.53,15.88
  Bottom 0.305: v11.75,16.51 v13.65,16.51 v13.65,15.24 v13.65,13.97 v13.65,12.7 v13.65,11.43 | v11.75,10.16 v11.75,11.43 v11.75,12.7 v11.75,13.97 v11.75,15.24
  pour Bottom: 0,0 8.89,0 8.89,8.26 0,8.26
  pour Top (rank 2): 0,0 8.89,0 8.89,17.78 0,17.78
  pour Top: 10.16,17.78 29.84,17.78 29.84,9.21 10.16,9.21
  pour Bottom: 10.16,17.78 29.84,17.78 29.84,9.21 10.16,9.21
N$3
  Top 0.406: D2.A 73.53,7.39 73.13,7 64.89,7 63.62,8.27 60.85,8.27 60.64,8.48 60.64,9.94 60.86,10.16 U2.1
N$4
  Top 0.406: R6.2 63.82,13.34 | 63.82,13.34 R5.1 | U2.2 63.18,8.89 63.82,9.53 63.82,13.34
N$5  (via drill 0.35)
  Top 0.406: U2.7 66.16,8.89 v65.85,8.58 v65.85,8.57 | v20.64,12.57 20.28,12.93 Q1.1
  Bottom 0.406: v65.85,8.57 65.85,3.42 65.11,2.68 44,2.68 34.1,12.57 v20.64,12.57
N$6
  Top 0.406: D2.C 72.62,10.39 R4.1
N$7
  Top 0.406: D1.C 72.62,5.31 R7.2
N$8
  Top 0.406: D3.C 74.21,15.88 R3.2
N$9
  Top 0.406: R8.2 R3.1
N$10
  Top 0.305: R13.2 31.43,30.8 U$4.1
N$11  (via drill 0.35)
  Top 0.406: D3.A 73.49,12.47 72.71,11.68 69.97,11.68 68.45,10.16 U2.8 67.63,10.61 v67.63,11.43 | Q1.2 19.33,14.61 v19.37,14.61
  Top 0.813: Q1.2 16.68,11.95 F1.2
  Bottom 0.406: v19.37,14.61 22.85,14.61 23.44,14.01 65.68,14.01 67.63,12.06 v67.63,11.43
N$12
  Top 0.305: D4.C 81.05,28.26 R9.2
N$13  (via drill 0.35, 0.65)
  Top 0.305: R7.1 70.49,3.37 v70.17,3.05
  Top 0.406: v3.81,8.89 4.45,8.89 | v5.08,11.43 4.45,11.43 | v3.81,13.97 4.45,13.34 | v4.13,15.24 4.45,14.92 5.08,14.92 5.08,13.97
  Top 0.813: CR5.1 4.45,4.59 4.45,6.35 | 4.45,6.35 4.45,8.89 | 4.45,8.89 4.45,11.43 | 4.45,11.43 4.45,13.34 5.08,13.97 CR1.1 | CR4.1 4.45,11.43 | CR2.1 4.45,8.89 | CR3.1 4.45,6.35 | v11.75,3.81 16.19,3.81 16.6,4.21 U1.2 16.6,5.31 15.56,6.35 v11.75,6.35
  Bottom 0.254: 8.62,8.64 4.06,8.64 v3.81,8.89
  Bottom 0.305: v70.17,3.05 68.39,1.27 31.69,1.27 29.88,3.08 28.87,3.08 27.48,4.47 27.48,9.79 27.3,9.97 23.51,9.97 23.32,9.79 23.32,4.47 21.93,3.08 14.19,3.08 v13.65,2.54 v13.65,1.27 v11.75,1.27 v11.75,2.54 v11.75,3.81 v11.75,5.08 v11.75,6.35 v11.75,7.62 11.53,7.84 9.41,7.84 8.62,8.64
  pour Bottom: 0,17.78 0,9.53 8.89,9.53 8.89,17.78
  pour Top: 2.86,1.91 6.03,1.91 6.03,15.88 2.86,15.88
  pour Top (rank 2): 10.16,8.57 16.51,8.57 16.51,0 10.16,0
  pour Bottom (rank 2): 10.16,8.57 16.51,8.57 16.51,0 10.16,0
N$14
  Bottom 0.305: U$2.2 58.42,29.02 57.28,30.16 TP1.TP
N$15
  Top 0.61: D6.C 39.6,43.91 R15.2
N$16  (via drill 0.45)
  Top 0.406: v62.23,51.44 62.07,51.6 61.14,51.6 60.27,52.46 56.28,52.46 56.2,52.37 | v65.91,51.44 67.94,51.44 69,50.38 U$5.P$8 | 56.2,52.37 54.55,50.73 Q2.1 | R16.2 56.2,52.37
  Bottom 0.406: v62.23,51.44 v65.91,51.44
N$17
  Top 0.61: D7.C 33.25,43.91 R19.2
N$18
  Top 0.406: U$6.P$8 0.85,45.34 4.2,41.99 11.42,41.99 12.14,41.27 R20.2 14.29,43.83 15.79,45.32 16.16,45.32 Q3.1
N$19
  Top 0.61: D8.C 26.9,43.91 R21.2
N$20
  Top 0.406: U$7.P$8 0.85,54.87 1.75,53.98 13.65,53.98 | 13.65,53.98 14.49,53.98 Q4.1 | 13.65,53.98 13.65,53.97 R22.2
N$21
  Top 0.61: D5.C 45.95,43.91 R14.1
N$22
  Top 0.406: Q2.3 47.72,52.78 43.77,48.83 38.05,48.83 36.6,47.38 D6.A
N$23  (via drill 0.35)
  Top 0.406: Q3.3 19.76,43.42 v22.54,40.64 | v28.57,40.64 D7.A
  Bottom 0.406: v22.54,40.64 v28.57,40.64
N$24
  Top 0.406: Q4.3 15.65,51.91 17.29,51.91 23.9,45.3 D8.A
N$25
  Top 0.305: D9.C R23.2
N$26  (via drill 0.4)
  Top 0.406: JP3.1 v93.34,59.75
  Bottom 0.406: U$9.8 87,60.64 87.88,59.75 v93.34,59.75
N$27  (via drill 0.4)
  Top 0.406: JP5.1 v89.15,60.77
  Bottom 0.406: U$9.9 89.53,61.28 89.15,60.9 v89.15,60.77
N$28
  Top 0.406: R28.1 D10.A
N$29
  Top 0.406: Q5.1 2.64,83.18 R29.2
N$30
  Top 0.813: U$11.P$2 7.62,82.23 Q5.3
N$31
  Top 0.813: U$11.P$1 U$12.P$2
N$32
  Top 0.813: U$12.P$1 R24.1
N$33
  Top 0.813: U$13.P$1 R25.1
N$34
  Top 0.813: U$14.P$1 U$13.P$2
N$35
  Top 0.813: U$14.P$2 Q6.3
N$36
  Top 0.406: Q6.1 2.64,79.37 R30.2
N$37
  Top 0.406: Q7.1 4.62,86.89 R31.2
N$38
  Top 0.813: U$15.P$2 6.99,86.04 Q7.3
N$39
  Top 0.813: U$15.P$1 U$16.P$2
N$40
  Top 0.813: U$16.P$1 R26.1
N$41
  Top 0.406: R27.1 D11.A
N$42
  Top 0.406: D11.C 8.01,89.85 Q8.3
N$43
  Top 0.406: Q8.1 4.62,90.7 R32.2
N$44  (via drill 0.35)
  Top 0.406: R32.1 2.54,88.44 1.63,87.54 1.63,86.25 2.54,85.34 R31.1 2.54,84.64 1.63,83.73 1.63,82.44 2.54,81.53 R29.1 2.54,80.83 1.63,79.92 1.63,78.62 2.54,77.72 R30.1 3.17,77.57 4.19,78.59 5.46,78.59 6.22,79.35 6.75,79.35 v7.62,80.22
  Bottom 0.406: v7.62,80.22 U$10.2
N$45
  Top 0.406: JP8.1 R28.2
SCK
  Top 0.305: JP2.5 33.42,67.63 34.61,68.82 37.78,68.82 38.97,67.63 JP1.5
  Bottom 0.305: U$8.5 14.61,67.75 15.68,68.82 25.08,68.82 26.27,67.63 JP2.5
SCL  (via drill 0.5)
  Top 0.305: J1.4 78.97,25.95 77.16,24.13 R10.2 76.52,24.13 v74.93,25.72
  Bottom 0.305: U$2.8 74.3,26.35 v74.93,25.72
SCL1  (via drill 0.45, 0.65)
  Top 0.406: U$3.8 58.73,44.77 R17.1 62.32,44.68 J4.4 64.61,44.84 64.61,46.83 63.18,48.26 63.18,53.32 62.3,54.21 U$5.P$3 | v55.88,40.01 55.46,39.58 13.04,39.58 11.19,41.44 7.78,41.44 7.55,41.2 U$6.P$3 | U$6.P$3 | U$6.P$3 6.84,40.64 v6.35,40.64 | v5.71,43.81 5.71,44.39 6.8,45.47 6.8,47.73 7.55,48.48 U$7.P$3
  Bottom 0.406: v55.88,40.01 57.78,41.91 U$3.8 | v5.71,43.81 5.71,42.35 6.35,41.72 v6.35,40.64
  other vias: 57.78,45.72
SDA  (via drill 0.5)
  Top 0.305: J1.3 79.88,24.95 79.38,24.45 R11.2 71.44,22.86 v71.12,22.54
  Bottom 0.305: U$2.7 v71.12,22.54
SDA1  (via drill 0.45, 0.65)
  Top 0.406: U$3.7 58.74,42.23 R18.1 62.23,43.18 62.73,43.68 J4.3 65.63,43.68 65.8,43.85 65.8,50.25 65.09,50.96 U$5.P$2 | U$6.P$2 3.17,41.51 v3.17,41.91 | v3.17,48.9 3.73,49.45 U$7.P$2
  Bottom 0.406: v3.17,48.9 v3.17,41.91 3.97,41.91 6.03,39.86 52.56,39.86 55.24,42.55 U$3.7
  other vias: 55.24,45.72
THERM  (via drill 0.5)
  Top 0.305: U3.2 78.42,33.66 R12.2 67,33.66 v63.5,30.16
  Bottom 0.305: U$2.4 v63.5,30.16
WIFI_CHECK
  Bottom 0.305: U4.3 55.75,22.41 66.68,22.41 67.31,23.05 67.31,29.66 67.94,30.29 75.57,30.29 76.2,29.66 U$2.9

## Text on the board
tPlace: Darkextratoasty | NC | MISO | MOSI | SCK | RX | 3V3 | ESP-01 Slim V0.1 / Darkextratoasty / Updated: 1/16/25 | CS | GD0 | G0 | RST | 3V3 | GND | G0 | EN | GND | TX | Updated: 1/16/25 | CC1101 NRF24L01 / NRF24L01+LNA / Slim Adapter V0.2 | EDC-1 V0.1 / Darkextratoasty / Updated: 1/16/25 | LED Flashlight / Xiao WiFi Scanner / DS18B20 Sensor / QWIIC Connector | Supercap IR Blinder / V0.2 / Darkextratoasty / Updated: 1/16/25 | 20W IR Bursts
bPlace: IR Blaster / Mini V1 | 12/27/24
tNames: I2C & OneWire / Probe Board V0.1 / Darkextratoasty / Updated: 1/16/25 | 3.3V / SDA/C1 / SCL/C0 / GND | 3.3V / SDA/C1 / SCL/C0 / GND | File to / lines | + | -